# Altium PCB park-contor.PcbDoc
Units mm, origin at the board's own origin, x right, y up, seen from the top; angles counter-clockwise.
Board outline 151 x 86.38 mm, 2 copper layers (Top Layer, Bottom Layer); 28 components, 34 nets, 114 pads, 4 vias.
Unrouted connection lines stored in the file: 5.
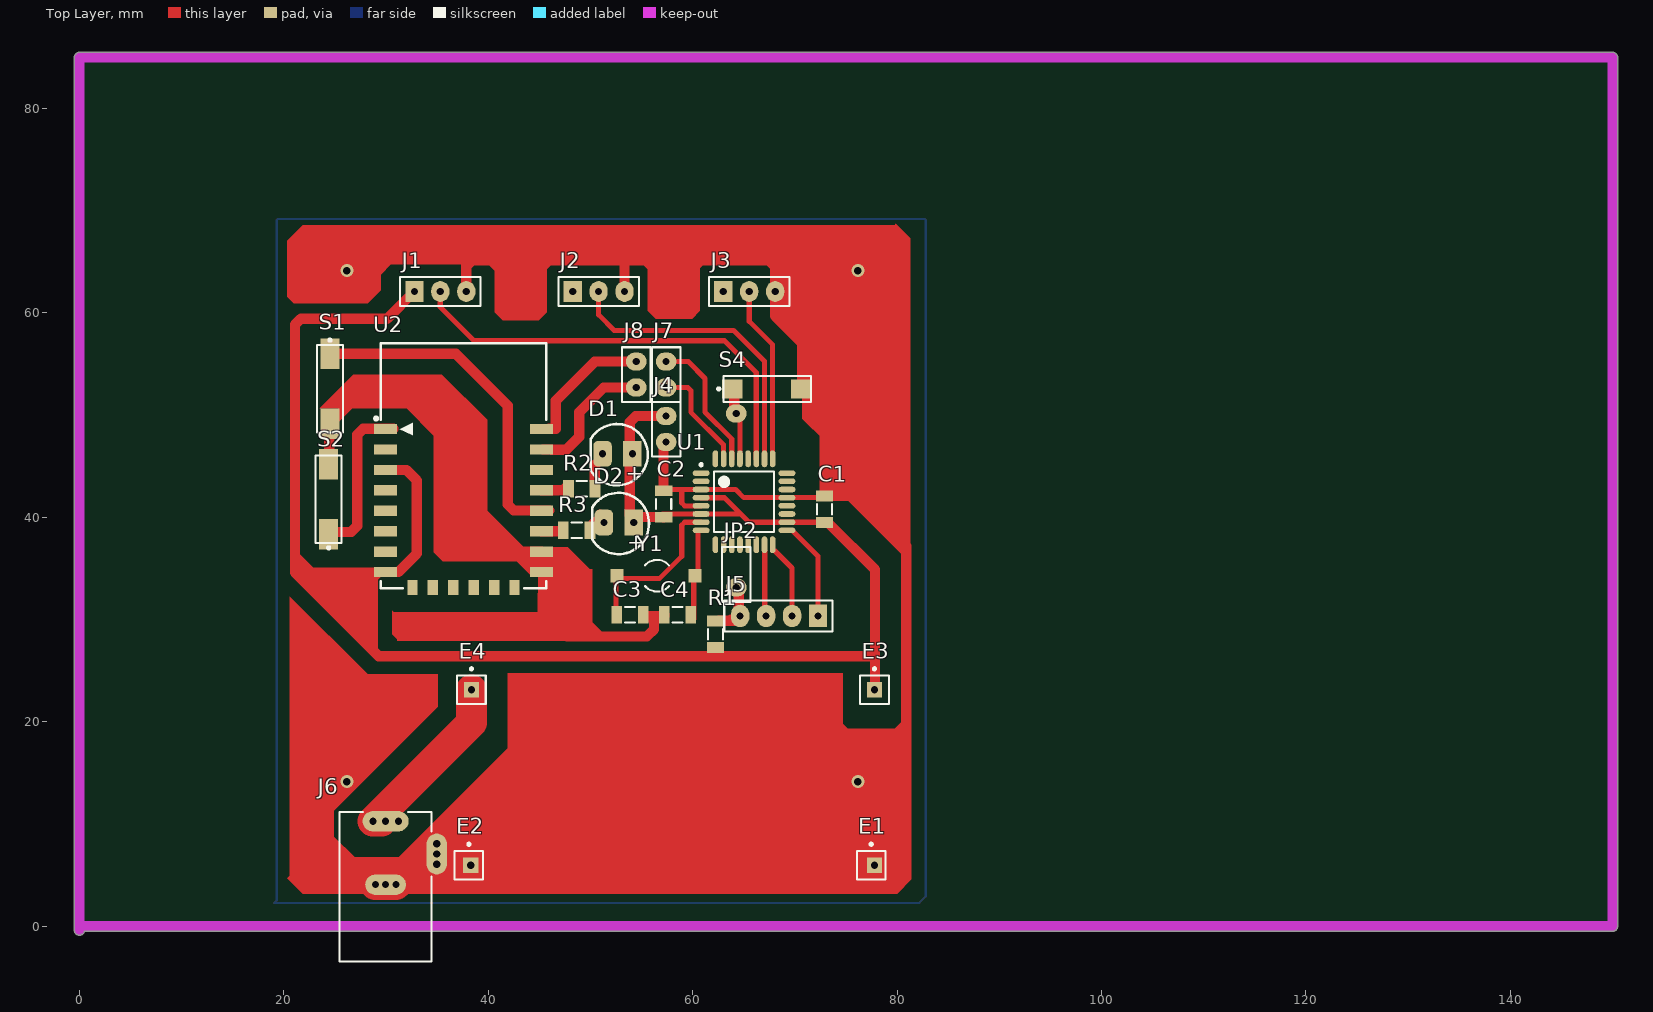
[diagram p0: Top Layer view]
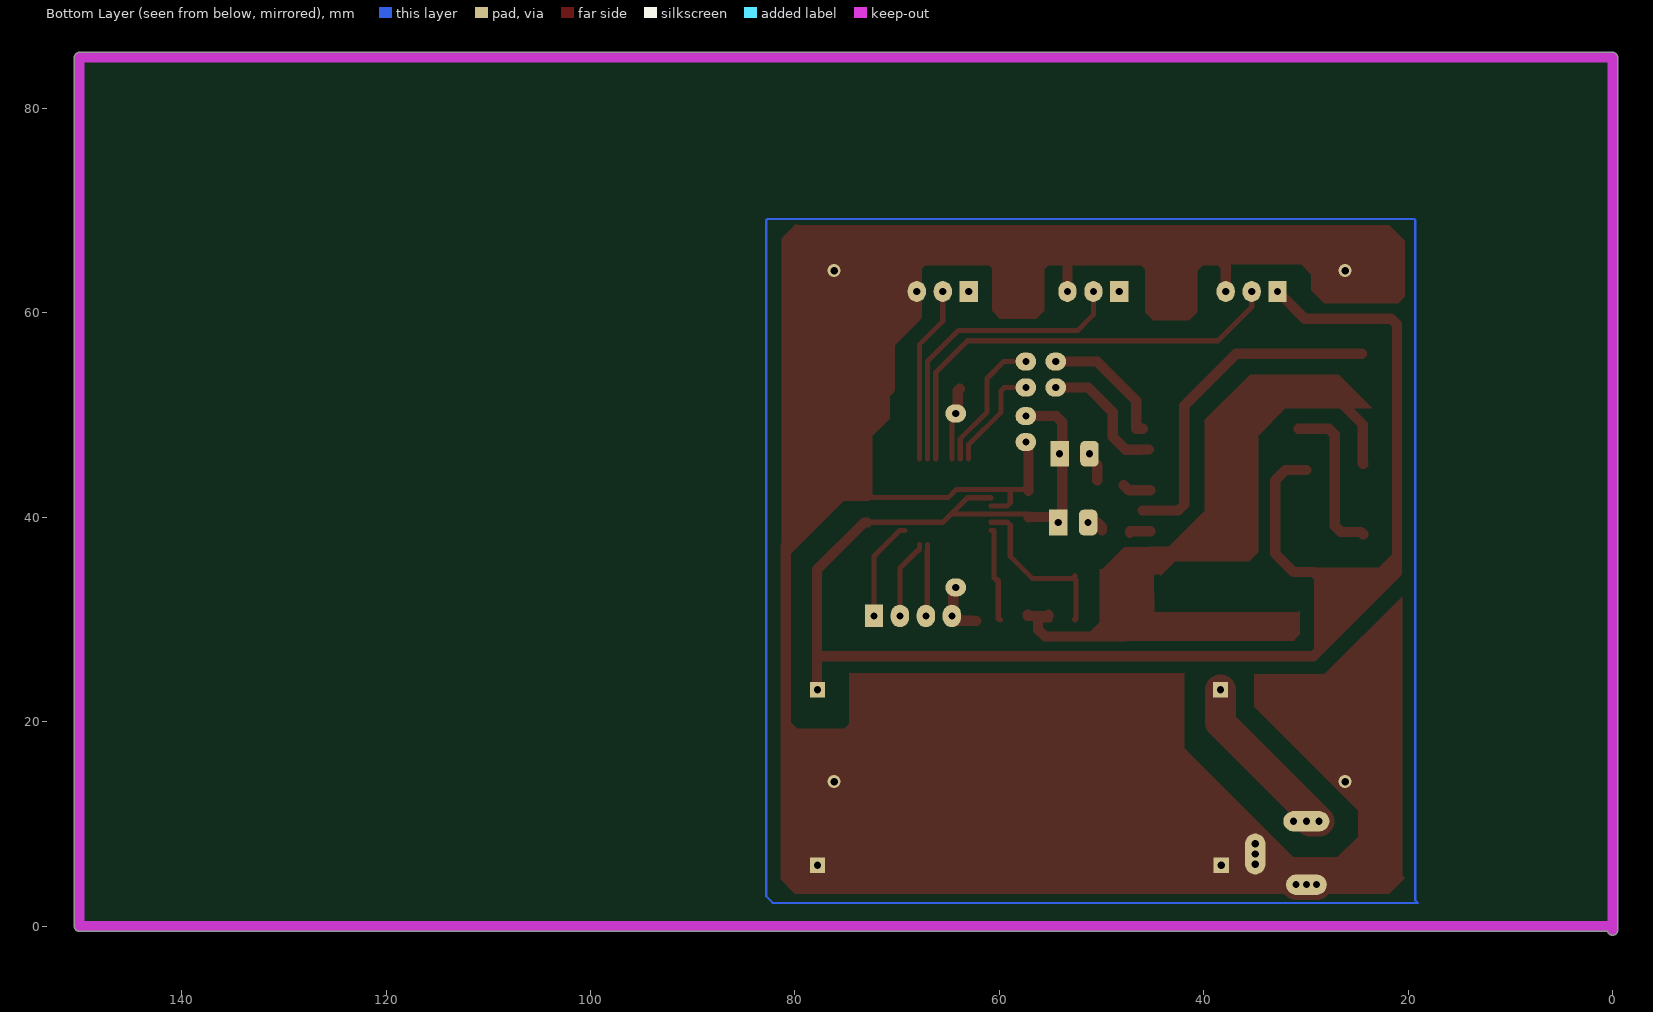
[diagram p1: Bottom Layer view, seen from below]
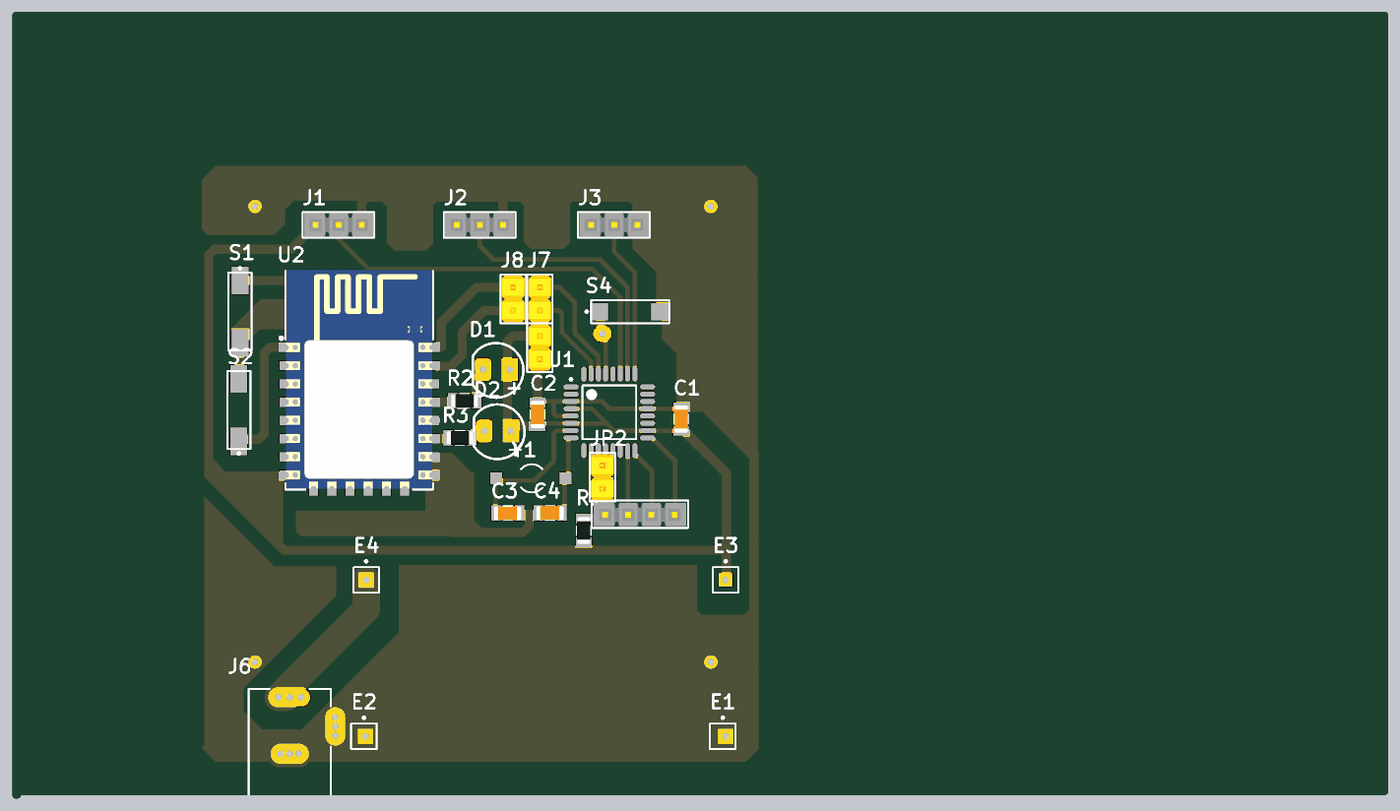
[diagram p2: 3D render of the assembled board from above, using the file's embedded part models]

## Layer stack, top to bottom
Top Solder: solder mask 0.0102, Solder Resist, Dk 3.5
Top Layer: signal copper 0.0356
Dielectric 1: dielectric 0.32, FR-4, Dk 4.8
Bottom Layer: signal copper 0.0356
Bottom Solder: solder mask 0.0102, Solder Resist, Dk 3.5

## Board outline
-0.5,-0.381 -0.5,85 cw(c0,85) 0,85.5 150,85.5 cw(c150,85) 150.5,85 150.5,0 cw(c150,0) 150,-0.5 0.486,-0.5 cw(c0,-0.381)

## Design rules (kind name [scope] priority, off if disabled: settings)
Clearance Clearance_1 [InPolygon] p1: gap=0.8 ignorepadtopadclearanceinfootprint=FALSE
Clearance [All] p2: gap=0.254 ignorepadtopadclearanceinfootprint=FALSE except(0: Arc-Hole Track-Hole SMDPad-Hole THPad-Hole Via-Hole Fill-Hole Poly-Hole Region-Hole Text-Hole)
DiffPairsRouting [All] p1: maxlimit=0.254 minlimit=0.8 mostfreqgap=0.254 toplayer_minwidth=0.381 toplayer_maxwidth=0.381 toplayer_prefwidth=0.381 bottomlayer_minwidth=0.381 bottomlayer_maxwidth=0.381 bottomlayer_prefwidth=0.381 maxuncoupledlength=12.7
PolygonConnect [All] p1: connectstyle=Relief reliefconductorwidth=0.254 reliefentries=4 polygonreliefangle="90 Angle" airgapwidth=0.254
RoomDefinition park-contor [InComponentClass('park-contor')] p1: confinementstyle=ConfineIn formatcopy=TRUE lockcomponents=FALSE outline 151.638,0.762 536.575,0.762 536.575,58.547 151.638,58.547
RoutingLayers [All] p1: top layer_v5=FALSE bottom layer_v5=TRUE
RoutingVias [All] p1: holewidth=0.711 width=2.5 viastyle="Through Hole" minholewidth=0.711 minwidth=1.27 maxholewidth=0.711 maxwidth=2
SolderMaskExpansion [All] p1: expansion=0.102 istentingtop=FALSE
Width [All] p1: maxlimit=3 minlimit=0.5 preferedwidth=1
28 further rules are at their usual default settings.

## Components (designator, comment, footprint, x,y, rotation, side; value= is the part's Value field where it differs from the comment)
C1 "=Value" "CAP 1206" 72.898,40.767 r90 top
C2 "=Value" "CAP 1206" 57.15,41.275 r90 top
C3 "=Value" "CAP 1206" 53.848,30.48 r0 top
C4 "=Value" "CAP 1206" 58.547,30.48 r180 top
D1 "LED 5mm" LED-1 52.705,46.228 r270 top
D2 "LED 5mm" LED-1 52.832,39.497 r270 top
E1 "Antenna" PIN1#1 77.47,5.969 r0 top
E2 "Antenna" PIN1#2 38.1,5.969 r0 top
E3 "Antenna" PIN1#3 77.786,23.135 r0 top
E4 "Antenna" PIN1#3 38.354,23.135 r0 top
J1 "Header3X1" "HEADER 3X1" 32.766,62.103 r0 top
J2 "Header3X1" "HEADER 3X1" 48.26,62.103 r0 top
J3 "Header3X1" "HEADER 3X1" 62.992,62.103 r0 top
J4 "Header2X1" "Header 2X1"#1 57.404,48.641 r270 top
J5 "Header4X1" "HEADER 4X1" 72.263,30.353 r180 top
J6 "PWR2.5" KLD-0202 29.956,-3.436 r90 top
J7 "Header2X1" "Header 2X1"#1 57.404,53.975 r90 top
J8 "Header2X1" "Header 2X1"#1 54.483,53.975 r270 top
JP2 "Jumper" "Header 2X1"#2 64.262,34.417 r90 top
R1 "10K" "RES 1206 (3216X08L)" 62.23,28.575 r270 top
R2 "10K" "RES 1206 (3216X08L)" 49.149,42.799 r0 top
R3 "10K" "RES 1206 (3216X08L)" 48.641,38.735 r0 top
S1 "SW-PB" SPST-2#1 24.511,52.578 r270 top
S2 "SW-PB" SPST-2#1 24.384,41.783 r90 top
S4 "SW-PB" SPST-2#2 67.31,52.578 r0 top
U1 "ATmega8-16AC" 32A_N 65.024,41.529 r0 top
U2 "ESP_12_E" ESP_12_E 29.576,48.647 r0 top
Y1 "XTAL" R38 56.515,34.29 r270 top

## Footprints (in the part's own frame and the unit in brackets; to place one, negate y for a bottom-side part, rotate by r counter-clockwise, add the part's x,y. Pads: shape width x height; smd on the part's side, far side on the other; paste and mask are expansions set on the pad)
32A_N [mm] "Thin QFP, 32-Leads, Body 7x7mm, Pitch 0.8mm, IPC Medium Density"
  oval 1.65x0.55 smd: 1(-4.2,2.8) 2(-4.2,2) 3(-4.2,1.2) 4(-4.2,0.4) 5(-4.2,-0.4) 6(-4.2,-1.2) 7(-4.2,-2) 8(-4.2,-2.8) 17(4.2,-2.8) 18(4.2,-2) 19(4.2,-1.2) 20(4.2,-0.4) 21(4.2,0.4) 22(4.2,1.2) 23(4.2,2) 24(4.2,2.8)
  oval 0.55x1.65 smd: 9(-2.8,-4.2) 10(-2,-4.2) 11(-1.2,-4.2) 12(-0.4,-4.2) 13(0.4,-4.2) 14(1.2,-4.2) 15(2,-4.2) 16(2.8,-4.2) 25(2.8,4.2) 26(2,4.2) 27(1.2,4.2) 28(0.4,4.2) 29(-0.4,4.2) 30(-1.2,4.2) 31(-2,4.2) 32(-2.8,4.2)
  silkscreen extent -4.32,-2.95 2.95,3.75, body extent -3.5,-3.5 3.5,3.5, height 1.2
"CAP 1206" [mm]
  rect 1.05x1.7 smd: 1(-1.27,0) 2(1.326,0)
  silkscreen extent -0.47,-0.75 0.53,0.75, body extent -1.49,-0.77 1.55,0.75, height 0.75
ESP_12_E [mm] "ESP-12 Wi-Fi Module by AI-Thinker"
  rect 2.25x1 smd: 1(0.375,0) 2(0.375,-2) 3(0.375,-4) 4(0.375,-6) 5(0.375,-8) 6(0.375,-10) 7(0.375,-12) 8(0.375,-14) 15(15.625,-14) 16(15.625,-12) 17(15.625,-10) 18(15.625,-8) 19(15.625,-6) 20(15.625,-4) 21(15.625,-2) 22(15.625,0)
  rect 1x1.5 smd: 9(3,-15.5) 10(5,-15.5) 11(7,-15.5) 12(9,-15.5) 13(11,-15.5) 14(13,-15.5)
  silkscreen extent -0.7,-15.57 16.08,8.37, body extent 0,-15.49 16,8.51, height 2.75
"Header 2X1"#1 [mil]
  oval 70x80 hole 27.56: 1(-50,0) 2(50,0)
  silkscreen extent -105,-55 105,55, body extent -100,-50 100,50, height 374
"Header 2X1"#2 [mil]
  oval 70x80 hole 27.56: 1(-50,0) 2(620,0)
  silkscreen extent -105,-55 105,55, body extent -100,-50 100,50, height 374
"HEADER 3X1" [mil]
  rect 70x80 hole 27.56: 1(0,0)
  oval 70x80 hole 27.56: 2(100,0) 3(200,0)
  silkscreen extent -55,-55 255,55, body extent -49,-50 251,50, height 330
"HEADER 4X1" [mm]
  rect 1.8x2.2 hole 0.7: 1(0,0)
  oval 1.8x2.2 hole 0.7: 2(2.54,0) 3(5.08,0) 4(7.62,0)
  silkscreen extent -1.43,-1.5 9.18,1.5, body extent -1.19,-1.22 8.97,1.32, height 8.38
KLD-0202 [mm] "DC Power Jack, 2.5mm, KLD Series, PCB Mount"
  oval 2x4.5 hole 0.7: 1(13.7,0)
  round 1.5 hole 0.7: 1A(13.7,-1.25) 1B(13.7,1.25) 2A(7.5,-1) 2B(7.5,1) 3A(9.5,-5) 3B(11.5,-5)
  oval 2x4 hole 0.7: 2(7.5,0)
  oval 4x2 hole 0.7: 3(10.5,-5)
  silkscreen extent 0,-4.5 14.6,4.5
LED-1 [mm] "LED; 2 Leads"
  rect 2.5x1.8 hole 0.7: 1(0,1.397)
  rrect50% 2.5x1.8 hole 0.7: 2(0,-1.524)
  silkscreen extent -2.91,-2.67 3.09,2.9
PIN1#1 [mm] "Generic Antenna; 1 Lead"
  rect 1.5x1.5 hole 0.7: 1(0.316,0)
  silkscreen extent -1.4,-1.4 1.4,2.17
PIN1#2 [mm] "Generic Antenna; 1 Lead"
  rect 1.5x1.5 hole 0.7: 1(0.186,0)
  silkscreen extent -1.4,-1.4 1.4,2.17
PIN1#3 [mm] "Generic Antenna; 1 Lead"
  rect 1.5x1.5 hole 0.7: 1(0,0)
  silkscreen extent -1.4,-1.4 1.4,2.17
R38 [mm] "Crystal, Thru-Hole; 2 Leads; Body 3.1 x 8.2 mm (Dia.xH)"
  rect 1.3x1.3 smd: 1(0,3.709) 2(0,-3.911)
  silkscreen extent -1.55,-1.19 1.55,1.17
"RES 1206 (3216X08L)" [mm] "Chip Resistor, 2-Leads, Body 3.2x1.6mm, IPC High Density _ (0.125 W)"
  rect 1.05x1.7 smd: 1(-1.295,0) 2(1.301,0)
  silkscreen extent -0.5,-0.75 0.5,0.75, body extent -1.52,-0.76 1.53,0.76, height 0.6
SPST-2#1 [mm] "Switch; 2 Leads"
  rect 3x1.85 smd: 1(-3.429,0) 2(3.429,0)
  silkscreen extent -4.89,-1.27 4.28,1.27
SPST-2#2 [mm] "Switch; 2 Leads"
  rect 2x1.85 smd: 1(-3.429,0) 2(3.302,0)
  silkscreen extent -4.89,-1.27 4.28,1.27

## Part data
C1 C2 C3 C4: library part Capacitor, "Capacitor"
D1 D2: "Typical LED", Designer="Seyed Mohsen Ghasemian", PackageDescription="LED; 2 Leads", PackageReference=LED, Published=07/31/2012, Publisher=www.picpars.com
E1 E2 E3 E4: "Generic Antenna", LatestRevisionDate=17-Jul-2002, LatestRevisionNote="Re-released for DXP Platform.", PackageReference=PIN1, Published=24-Mar-1999, Publisher="Altium Limited"
J6: "Low Voltage Power Supply Connector", ComponentLink1Description="Manufacturer Link", ComponentLink1URL=http://domino.kycon.com/internet/Products.html, DatasheetDocument=09-May-2002, Published=17-Dec-2003, Publisher="Altium Limited"
R1 R2 R3: library part Resistor, "Resistor", Power="1/4 W", Tolerance=5%
S1 S2 S4: "Switch", LatestRevisionDate=17-Jul-2002, LatestRevisionNote="Re-released for DXP Platform.", PackageDescription="Switch; 2 Leads", PackageReference=SPST-2, Published=24-Mar-1999, Publisher="Altium Limited"
U1: "8-Bit AVR Microcontroller with 8K Bytes of In-System Programmable Flash Memory", Supplier Part Number 1=ATMEGA8-16AC-ND, Code_JEDEC=MS-026-ABA, ComponentLink1Description=Datasheet, ComponentLink1URL=http://www.atmel.com/dyn/resources/prod_documents/doc2486.pdf, ComponentLink2Description="Atmel.com Home", ComponentLink2URL=http://www.atmel.com, DatasheetVersion=2486H-AVR-09/02, LatestRevisionDate=16-Oct-2006, LatestRevisionNote="IPC-7351 Footprint Added.", PackageDescription="32-Lead, 7x7x1.0 mm Body, 0.8mm Lead Pitch, Thin Profile Plastic Quad Flat Package (TQFP)", PackageReference=32A, PackageVersion="revB, Oct-2001", Published=17-Sep-2003, Publisher="Altium Limited", Supplier 1=Digi-Key, Supplier 2=Mouser, Supplier Part Number 2=556-ATMEGA8-16AC
U2: "ESP-12 Wi-Fi Module by AI-Thinker", IC=ESP8266-EX, Vendor=Ai-thinker
Y1: "Crystal Oscillator", LatestRevisionDate=17-Jul-2002, LatestRevisionNote="Re-released for DXP Platform.", PackageDescription="Crystal, Thru-Hole; 2 Leads; Body 3.1 x 8.2 mm (Dia.xH)", PackageReference=R38, Published=8-Jun-2000, Publisher="Altium Limited"

## Via types
v1: diameter 1.27, hole 0.711, Top Layer to Bottom Layer, 4 vias

## Nets (pads, with @x,y where several pads share a name; then routed paths per layer and width w, separated by ;. In a path a pad name is that pad's centre, name@x,y a point inside that pad or via, vN(x,y) a via of type N, cw(c..) or ccw(c..) an arc to the next point about the centre after c; other vN are vias at no path point)
ADC: U2.2
btn: S1.1 U2.18 | length 33.5
  Top Layer w1: S1.1 36.83,56.007 41.91,50.927 41.91,41.258 42.496,40.672 U2.18@45.974,40.672
GND: C1.2 C2.2 C3.2 C4.2 E1.1 E2.1 J1.3 J2.3 J3.3 J4.2 J6.2 J6.2A J6.2B J6.3 J6.3A J6.3B S1.2 S2.2 S4.2 U1.3 U1.5 U1.21 U2.15 U2.16 | length 235.5
  Top Layer w0.5: C3.2@55.047,29.972 56.226,29.972 ; C2.2@57.15,42.729 58.928,42.729 ; U1.5 59.221,41.129 58.928,41.422 58.928,42.729 ; C1.2 72.898,41.939 69.234,41.939 U1.21 65.005,41.929 64.205,42.729 U1.3 58.928,42.729
  Top Layer w1: S2.2 24.447,45.276 24.447,49.085 S1.2 26.67,51.308 33.274,51.308 37.592,46.99 37.592,40.386 41.331,36.647 U2.16 U2.15 ; J1.3 37.846,64.565 38.432,65.151 53.213,65.151 ; U2.15@45.349,34.647 45.349,30.724 47.719,28.354 55.532,28.354 56.226,29.048 56.226,29.972 ; J2.3 53.34,65.024 53.213,65.151 ; C3.2 55.174,30.378 55.199,30.353 57.196,30.353 57.221,30.378 C4.2 ; C2.2 C2.2@57.15,42.729 ; C2.2@57.15,42.626 J4.2@57.15,47.117 ; E1.1 80.899,9.082 80.899,37.211 76.017,42.093 C1.2 72.898,50.292 71.112,52.078 71.112,52.153 70.687,52.578 70.687,57.075 68.072,59.69 J3.3 68.072,64.516 67.437,65.151 53.213,65.151
  Top Layer w3: J6.2B J6.2 J6.2A 32.956,6.064 J6.3A E2.1@38.767,6.064 ; E2.1 E1.1
  other v1: 26.162,14.135 76.162,14.135 26.162,64.135 76.162,64.135
i1: J1.2 U1.27 | length 43.5
  Top Layer w0.5: J1.2 35.306,60.579 38.608,57.277 63.119,57.277 66.224,54.172 U1.27
i2: J2.2 U1.26 | length 29.9
  Top Layer w0.5: J2.2 50.8,59.817 52.324,58.293 64.008,58.293 67.024,55.277 U1.26
i3: J3.2 U1.25 | length 17.3
  Top Layer w0.5: J3.2 65.532,59.182 67.824,56.89 U1.25
i8: 
i9: U2.7
i10: 
i11: U2.5
i12: U2.4
i13: U2.6
led: R3.1 U2.17 | length 2.2
  Top Layer w1: U2.17 47.194,38.647 47.219,38.622 R3.1@47.219,38.481
NetC3_1: C3.1 U1.7 Y1.2 | length 16.4
  Top Layer w0.5: C3.1@52.514,30.035 52.514,33.846 Y1.2@52.578,33.909 ; C3.1@52.578,29.972 C3.1@52.642,30.035 ; Y1.2 52.858,34.036 56.769,34.036 58.928,36.195 58.928,39.227 59.221,39.519 60.814,39.519 U1.7
NetC4_1: C4.1 U1.8 Y1.1 | length 9.3
  Top Layer w0.5: C4.1@59.873,29.972 C4.1@59.972,30.071 ; C4.1@60.099,30.071 60.099,33.81 Y1.1@60.198,33.909 ; Y1.1@60.261,33.846 60.511,34.095 60.511,38.706 60.534,38.729 U1.8
NetD1_2: D1.2 R2.2 | length 2.9
  Top Layer w1: R2.2@50.419,43.617 50.419,45.116 51.181,45.878 D1.2
NetD2_2: D2.2 R3.2 | length 2
  Top Layer w1: R3.2 49.942,39.06 50.391,39.509 50.527,39.509 50.927,39.909 D2.2@50.927,40.259
NetJ5_1: J5.1 U1.17 | length 9.9
  Top Layer w0.5: U1.17 69.76,38.729 69.784,38.706 69.784,38.674 72.263,36.195 J5.1
NetJ5_2: J5.2 U1.16 | length 7.9
  Top Layer w0.5: U1.16 67.824,36.793 67.847,36.769 68.006,36.769 69.723,35.052 J5.2
NetJ5_3: J5.3 U1.15 | length 7
  Top Layer w0.5: U1.15 67.034,37.319 67.034,36.725 67.045,36.714 67.045,30.491 J5.3
NetJ7_1: J7.1 U1.31 | length 10.5
  Top Layer w0.5: J7.1 59.524,52.705 59.817,52.412 59.817,50.292 63.003,47.106 63.003,46.335 63.014,46.324 63.014,45.739 U1.31
NetJ7_2: J7.2 U1.30 | length 13.4
  Top Layer w0.5: J7.2 59.563,55.245 61.214,53.594 61.214,50.292 63.824,47.682 U1.30
NetJ8_1: J8.1 U2.22 | length 12.8
  Top Layer w1: U2.22@45.974,48.672 46.599,48.672 46.599,51.425 50.419,55.245 J8.1
NetJ8_2: J8.2 U2.21 | length 12
  Top Layer w1: U2.21@45.383,46.647 46.119,46.647 46.157,46.609 47.625,46.609 48.895,47.879 48.895,50.292 51.308,52.705 J8.2@53.467,52.705
NetR2_1: R2.1 U2.19 | length 2.8
  Top Layer w1: U2.19 47.321,42.647 R2.1@47.826,43.152
o8: 
o9: 
o10: 
rst: J5.4 JP2.1 JP2.2 R1.1 S2.1 S4.1 U1.29 U2.1 | length 29
  Top Layer w0.5: JP2.2@64.516,50.165 64.614,50.067 64.614,45.739 U1.29
  Top Layer w1: S2.1 24.608,38.578 26.592,38.578 27.178,39.163 27.178,48.086 27.764,48.672 U2.1@30.724,48.672 ; R1.1 62.555,29.87 62.58,29.895 63.657,29.895 ; S4.1 64.072,52.387 64.072,50.355 JP2.2 ; J5.4@64.273,30 63.762,30 63.657,29.895 ; JP2.1@64.516,33.147 64.516,30.48 J5.4 64.627,30.353 64.169,29.895 63.657,29.895
rst2: 
rx: 
tx: 
vcc: E4.1 J6.1 J6.1A J6.1B | length 17.8
  Top Layer w3: J6.1@29.591,10.264 J6.1B 38.354,19.912 E4.1
vdd: C1.1 C2.1 D1.1 D2.1 E3.1 J1.1 J2.1 J3.1 J4.1 R1.2 U1.4 U1.6 U1.18 U2.3 U2.8 | length 175.9
  Top Layer w0.5: C2.1@57.037,40.329 U1.6 64.7,40.329 ; U1.4 60.834,41.919 63.11,41.919 64.7,40.329 ; C1.1@72.898,39.519 69.234,39.519 U1.18 65.5,39.529 64.7,40.329
  Top Layer w1: U2.8@29.79,34.656 29.288,34.656 28.702,34.07 28.702,27.002 ; U2.8 31.201,34.647 33.009,36.455 33.009,43.616 31.978,44.647 U2.3 ; J1.1 30.099,59.436 21.668,59.436 21.082,58.85 21.082,34.622 28.702,27.002 ; D2.1@53.848,40.259 53.848,46.482 53.848,49.325 54.434,49.911 J4.1@57.78,49.911 ; D2.1@54.102,40.03 57.125,40.03 C2.1 ; C1.1 73.223,39.497 77.851,34.869 77.851,26.416 ; E3.1 77.851,23.2 77.851,26.416 ; 28.702,27.002 29.288,26.416 77.851,26.416
pads on no net: U1.1 U1.2 U1.9 U1.10 U1.11 U1.12 U1.13 U1.14 U1.19 U1.20 U1.22 U1.23 U1.24 U1.28 U1.32 U2.9 U2.10 U2.11 U2.12 U2.13 U2.14 U2.20
copper on no net: | length 260.7
  Bottom Layer w0.2: 19.05,2.286 19.304,2.54 19.304,69.098 19.421,69.215 82.687,69.215 82.804,69.098 82.804,2.921 82.169,2.286 19.05,2.286

## Keep-outs
Keep-Out Layer:
  lines w1: 0,-0.381 0,85 150,85 150,0 0,0

## Other copper
Top Layer:
  region net GND: 44.831,31.115 44.831,30.734 30.734,30.734 30.607,30.861 30.607,28.575 31.115,28.067 31.115,27.94 51.689,27.94 51.816,28.067 50.165,29.718 50.165,34.925 49.911,34.925 47.752,37.084 44.958,37.084
  region net vdd: 21.336,36.576 22.86,35.052 29.972,35.052 28.702,33.782 28.995,33.489 28.995,26.709 21.082,34.622
  region net GND: 43.266,36.647 45.903,36.647 45.974,36.576 45.974,34.417 44.323,34.417 44.196,34.29 41.91,36.576 41.656,36.576
  region net GND: 23.495,50.673 26.797,53.975 35.433,53.975 39.878,49.53 39.878,40.64 44.831,35.687 35.56,35.687 34.671,36.576 34.671,48.006 32.004,50.673
  region net GND: 54.229,65.659 55.626,64.262 55.626,60.198 56.388,59.436 59.944,59.436 60.706,60.198 60.706,64.389 61.976,65.659
  region net GND: 55.626,65.405
  region net GND: 39.243,65.532 40.64,64.135 40.64,60.071 41.402,59.309 44.958,59.309 45.72,60.071 45.72,64.262 46.99,65.532
  region net GND: 81.407,36.83 81.28,36.957 81.28,67.31 79.883,68.707 79.756,68.58 21.844,68.58 20.32,67.056 20.32,61.595 20.955,60.96 28.194,60.96 29.464,62.23 29.464,63.754 30.48,64.77 67.437,64.77 68.199,64.008 68.199,59.436 70.739,56.896 70.739,49.657 72.898,47.498 72.898,42.291 73.025,42.164 75.311,42.164 75.565,41.91 74.93,41.91 81.026,35.814
  region net GND: 81.407,9.398 81.407,4.572 80.01,3.175 21.844,3.175 20.32,4.699 20.574,4.953 20.574,32.258 28.194,24.638 35.052,24.638 35.052,21.463 24.892,11.303 24.892,8.763 26.924,6.731 31.242,6.731 41.91,17.399 41.91,24.765 74.676,24.765 74.676,19.812 75.184,19.304 79.756,19.304 80.645,20.193 81.28,20.193

## Text inside footprints (layer, text, board x,y; h text height)
D1: Top Overlay "+" at 53.467,43.561 h1.52
D2: Top Overlay "+" at 53.594,36.83 h1.52
J6: Mechanical 1 "Mech 2 - Clearance, move to internal plane if present" at 24.89,-3.15 h0.3 r90; Mechanical 1 "Mech 1 - Slot cut-out" at 24.39,-3.15 h0.3 r90; Mechanical 1 "Assign keep-out area to slot" at 23.39,-3.15 h0.3 r90; Mechanical 1 "Alert PCB fab to slot details" at 23.89,-3.15 h0.3 r90
U2: Mechanical 13 "CUTOUT POLYGON" at 29.703,56.013 h0.25; Mechanical 13 "ANTENNA AREA" at 29.703,56.521 h0.25